# Allegro board MB1315A.brd
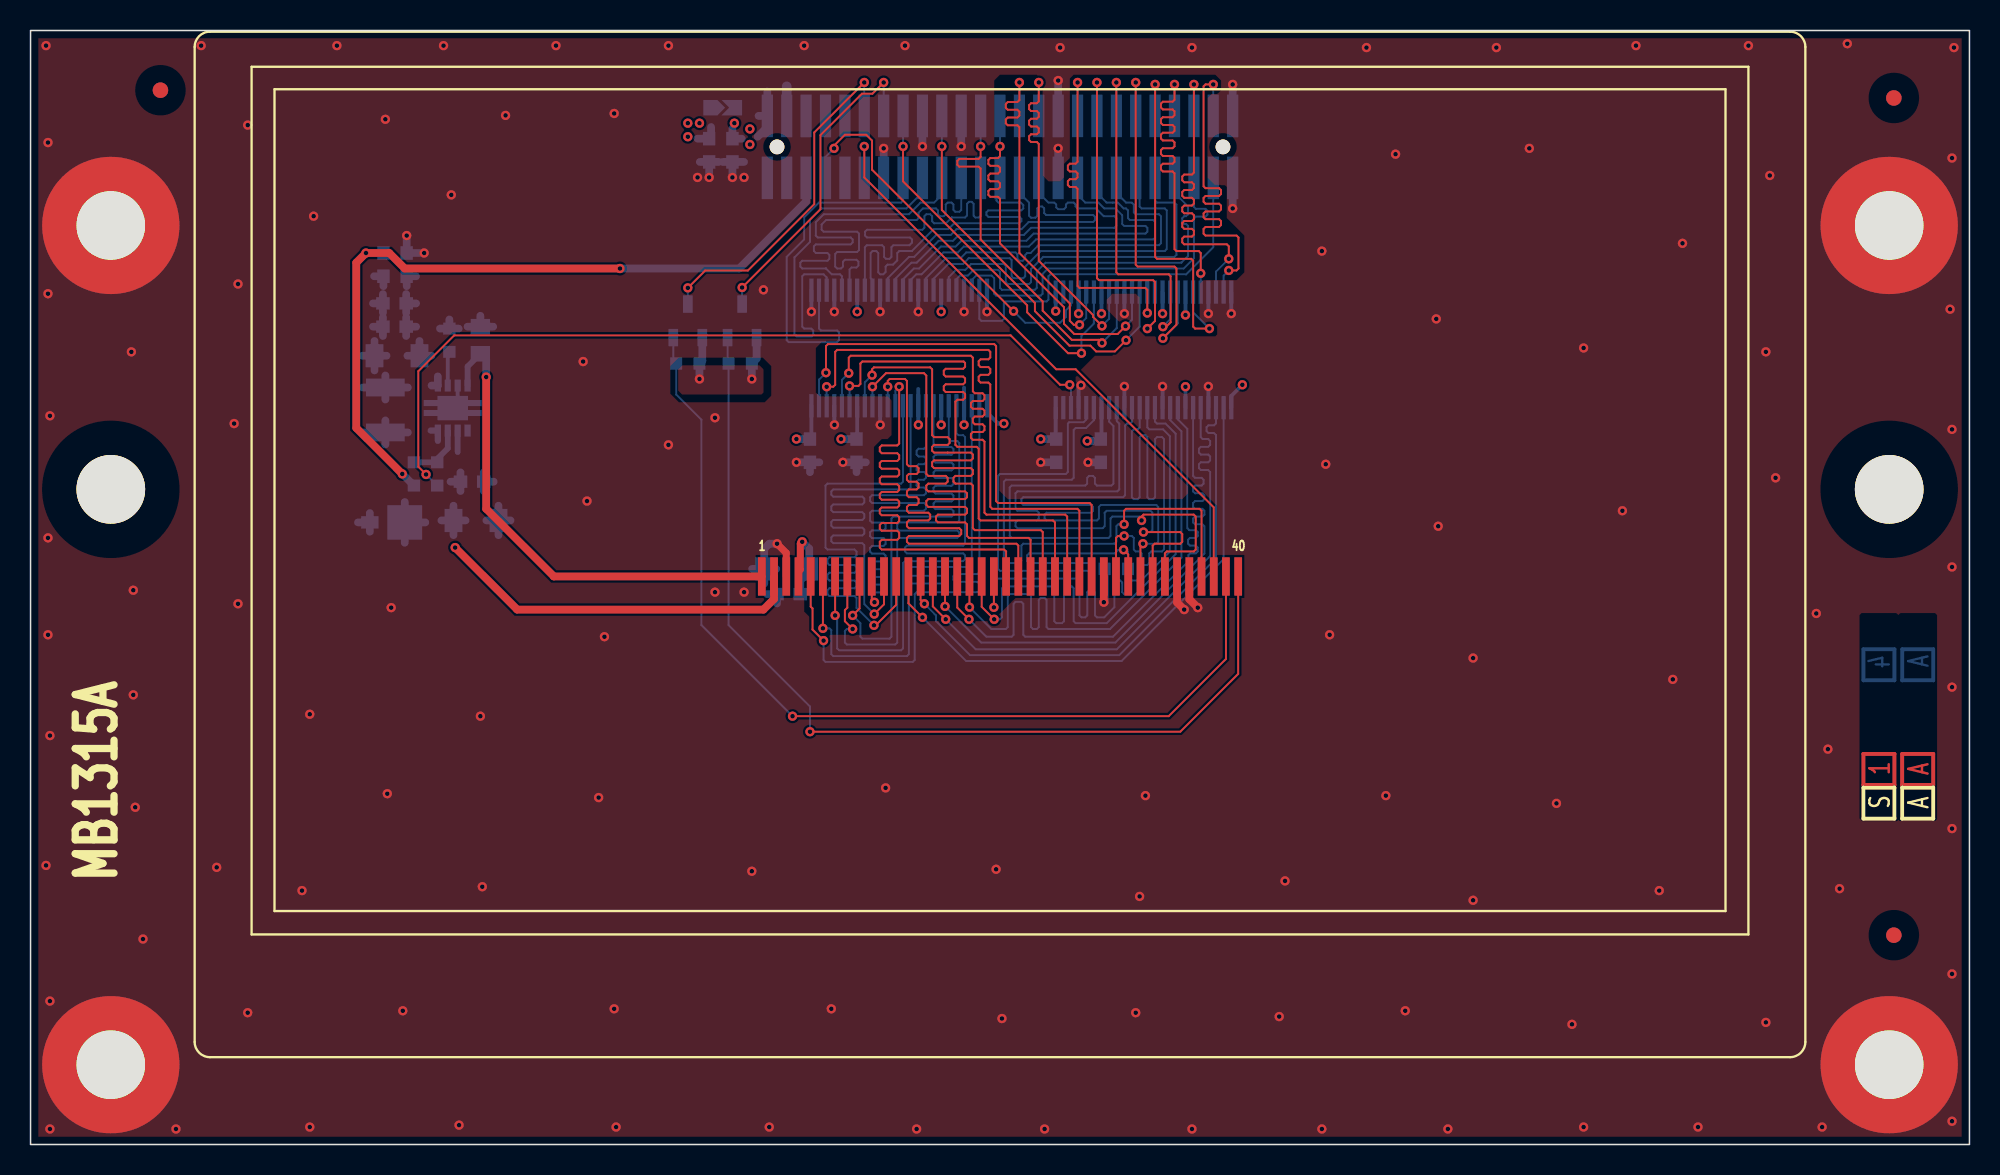
[diagram p0: board, top side]
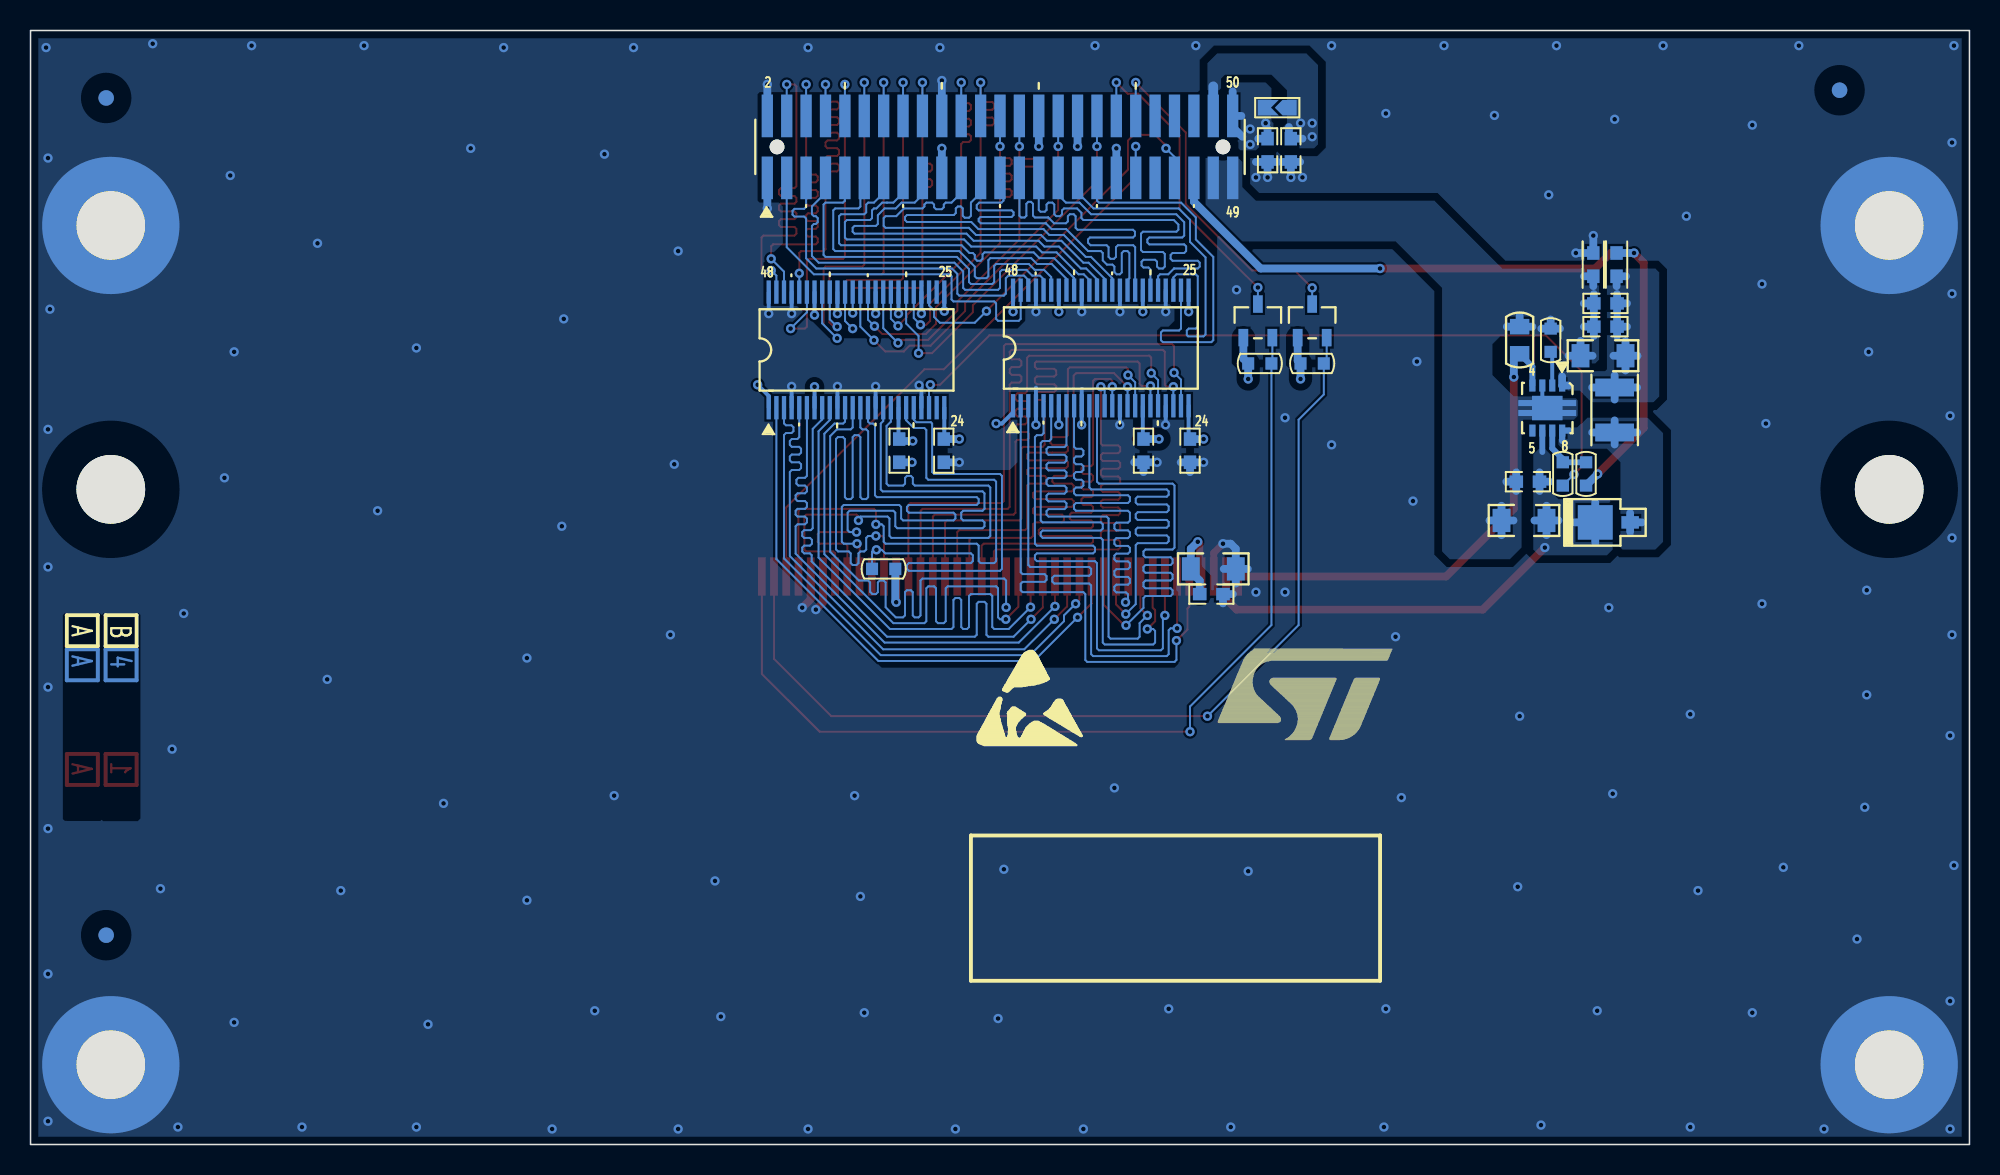
[diagram p1: board, bottom side, seen from below]

Outline 127 x 73 mm; copper layers: TOP, L2_GND, L3_VCC, BOTTOM. Coordinates in mm from the lower left corner of the outline.
Outline path: rectangle 0,0 127,73 ; 0,73 127,73 127,0 0,0 0,73

## Placement (name value [footprint] x y rotation side)
C1  100nF  [0603C]  45.97 65.15 90 bottom
C2  100nF  [0603C]  44.45 65.15 90 bottom
C3  100nF  [0603C]  23.84 55.12 180 bottom
C4  10nF  [0603C]  23.84 53.59 180 bottom
C5  4.7uF_16V  [1206C]  24 51.69 0 bottom
C6  100nF  [0603C]  70.1 45.47 90 bottom
C7  100nF  [0603C]  67.18 45.47 90 bottom
C8  100nF  [0603C]  54.1 45.47 90 bottom
C9  100nF  [0603C]  51.05 45.47 90 bottom
C10  10nF  [0603C]  28.92 43.43 180 bottom
C11  4.7uF_50V  [1206C]  29.18 40.89 0 bottom
C12  4.7uF_16V  [1206C]  49.53 37.72 180 bottom
C13  100nF  [0603C]  49.66 36.07 0 bottom
CN1  P127B-2_25MGF-079-1A  [FTSH-125-01-F-DV]  63.5 65.37 180 bottom
H1  POSITION HOLE  [HOLE_C9D4R5]  5.26 60.23 0 top
H2  POSITION HOLE  [HOLE_C9D4R5]  121.74 60.23 0 top
H3  POSITION HOLE  [HOLE_C9D4R5]  5.26 5.23 0 top
H4  POSITION HOLE  [HOLE_C9D4R5]  121.74 5.23 0 top
L1  BEAD  [0603L]  24.64 57.66 270 bottom
L2  BEAD  [0603L]  23.11 57.66 270 bottom
L3  4.7uH(1A)  [1210L]  23.24 48.13 270 bottom
NOREF  -  [unnamed]  122.05 13.72 0 top
NOREF#2  -  [#2]  0 0 0 top
NOREF#3  -  [unnamed]  122.05 68.58 0 top
NOREF#4  -  [#2]  124.37 24.58 90 top
NOREF#5  -  [#2]  167 108.84 0 top
NOREF#6  -  [unnamed]  8.51 69.09 0 top
NOREF#7  -  [#2]  0 0 90 top
NOREF#8  -  [unnamed#2]  5.26 42.93 0 top
NOREF#9  -  [#2]  389.13 -90.55 0 top
NOREF#10  -  [#2]  121.83 24.58 90 top
NOREF#11  -  [#2]  0 0 0 top
NOREF#12  -  [#2]  184.4 145.8 0 top
NOREF#13  -  [unnamed#2]  121.74 42.93 0 top
NOREF#14  -  [#2]  4.06 -24.89 0 top
NOREF#15  -  [unnamed]  8.51 69.09 180 bottom
NOREF#16  -  [unnamed]  122.05 68.58 180 bottom
NOREF#17  -  [unnamed]  122.05 13.72 180 bottom
R1  10_1%_0805  [0805R]  29.46 52.7 270 bottom
R2  100K  [0603R]  27.43 52.7 270 bottom
R3  4K7  [0603R]  46.48 51.18 0 bottom
R4  4K7  [0603R]  43.05 51.18 0 bottom
R5  0  [0603R]  26.64 43.94 270 bottom
R6  4K7  [0603R]  25.11 43.94 270 bottom
R7  4K7  [0603R]  71.12 37.72 180 bottom
SB1  Solder Bridge OFF  [SB_0603]  45.34 67.94 180 bottom
T1  BSN20  [SOT23-213]  46.61 53.98 270 bottom
T2  BSN20  [SOT23-213]  43.05 53.98 270 bottom
U1  RK043FN48H-CT672B  [LCD_RK043FN48H-CT672B]  63.5 39.32 0 top
U2  SN74LVC16T245DGGR  [TSSOP48_0R5_12R5X8R1]  56.9 52.2 180 bottom
U3  SN74LVC16T245DGGR  [TSSOP48_0R5_12R5X8R1]  72.9 52.07 180 bottom
U4  STLD40DPUR  [SON8_0R65_3X3]  27.65 48.26 0 bottom
Z1  STPS1L40M  [DO-216AA]  22.23 40.77 180 bottom

## Library data of the parts
C1-C4 C6-C10 C13 = 0603C
C5 C11 C12 = 1206C
CN1 = FTSH-125-01-F-DV
H1-H4 = HOLE_C9D4R5
L1 L2 = 0603L
L3 = 1210L
R1 = 0805R
R2-R6 = 0603R
R7 = 0603R: signal model: 0603R_4K7
SB1 = SB_0603
T1 T2 = SOT23-213
U1 = LCD_RK043FN48H-CT672B
U2 U3 = TSSOP48_0R5_12R5X8R1
U4 = SON8_0R65_3X3
Z1 = DO-216AA

## Footprints (pads in the part's own frame, mm; a bottom-side part is the same pattern mirrored in y, then rotated)
0603C
  rect 0.889x0.813 smd: 1(-0.762,0) 2(0.762,0)
0603L
  rect 0.889x0.813 smd: 1(-0.762,0) 2(0.762,0)
0603R
  rect 0.787x0.813 smd: 1(-0.762,0) 2(0.762,0)
0805R
  rect 1.016x1.27 smd: 1(-0.889,0) 2(0.889,0)
1206C
  rect 1.168x1.524 smd: 1(-1.473,0) 2(1.473,0)
1210L
  rect 1.168x2.54 smd: 1(-1.473,0) 2(1.473,0)
DO-216AA
  rect 1.143x0.813 smd: 1(0,0)
  rect 2.286x2.261 smd: 2(-2.286,0)
FTSH-125-01-F-DV
  round 0.965 hole 0.965 unplated: (-14.605,0) (14.605,0)
  rect 0.737x2.794 smd: 1(-15.24,-2.03) 2(-15.24,2.03) 3(-13.97,-2.03) 4(-13.97,2.03) 5(-12.7,-2.03) 6(-12.7,2.03) 7(-11.43,-2.03) 8(-11.43,2.03) 9(-10.16,-2.03) 10(-10.16,2.03) 11(-8.89,-2.03) 12(-8.89,2.03) 13(-7.62,-2.03) 14(-7.62,2.03) 15(-6.35,-2.03) 16(-6.35,2.03) 17(-5.08,-2.03) 18(-5.08,2.03) 19(-3.81,-2.03) 20(-3.81,2.03) 21(-2.54,-2.03) 22(-2.54,2.03) 23(-1.27,-2.03) 24(-1.27,2.03) 25(0,-2.03) 26(0,2.03) 27(1.27,-2.03) 28(1.27,2.03) 29(2.54,-2.03) 30(2.54,2.03) 31(3.81,-2.03) 32(3.81,2.03) 33(5.08,-2.03) 34(5.08,2.03) 35(6.35,-2.03) 36(6.35,2.03) 37(7.62,-2.03) 38(7.62,2.03) 39(8.89,-2.03) 40(8.89,2.03) 41(10.16,-2.03) 42(10.16,2.03) 43(11.43,-2.03) 44(11.43,2.03) 45(12.7,-2.03) 46(12.7,2.03) 47(13.97,-2.03) 48(13.97,2.03) 49(15.24,-2.03) 50(15.24,2.03)
HOLE_C9D4R5
  round 8.992 hole 4.496: 1(0,0)
LCD_RK043FN48H-CT672B
  rect 0.508x2.515 smd: 1(-15.6,-2.1) 2(-14.8,-2.1) 3(-14,-2.1) 4(-13.2,-2.1) 5(-12.4,-2.1) 6(-11.6,-2.1) 7(-10.8,-2.1) 8(-10,-2.1) 9(-9.2,-2.1) 10(-8.4,-2.1) 11(-7.6,-2.1) 12(-6.8,-2.1) 13(-6,-2.1) 14(-5.2,-2.1) 15(-4.4,-2.1) 16(-3.6,-2.1) 17(-2.8,-2.1) 18(-2,-2.1) 19(-1.2,-2.1) 20(-0.4,-2.1) 21(0.4,-2.1) 22(1.2,-2.1) 23(2,-2.1) 24(2.8,-2.1) 25(3.6,-2.1) 26(4.4,-2.1) 27(5.2,-2.1) 28(6,-2.1) 29(6.8,-2.1) 30(7.6,-2.1) 31(8.4,-2.1) 32(9.2,-2.1) 33(10,-2.1) 34(10.8,-2.1) 35(11.6,-2.1) 36(12.4,-2.1) 37(13.2,-2.1) 38(14,-2.1) 39(14.8,-2.1) 40(15.6,-2.1)
SB_0603
  round 0.152 smd: 1(-0.762,0) 2(0.762,0)
SON8_0R65_3X3
  rect 0.406x0.787 smd: 1(-0.975,-1.475) 2(-0.325,-1.475) 3(0.325,-1.475) 4(0.975,-1.475) 5(0.975,1.475) 6(0.325,1.475) 7(-0.325,1.475) 8(-0.975,1.475)
  custom 3.8x1.6 smd: 9(0,0)
SOT23-213
  rect 1.143x0.635 smd: 1(1.1,0.95) 2(1.1,-0.95) 3(-1.1,0)
TSSOP48_0R5_12R5X8R1
  rect 0.279x1.524 smd: 1(-5.75,-3.787) 2(-5.25,-3.787) 3(-4.75,-3.787) 4(-4.25,-3.787) 5(-3.75,-3.787) 6(-3.25,-3.787) 7(-2.75,-3.787) 8(-2.25,-3.787) 9(-1.75,-3.787) 10(-1.25,-3.787) 11(-0.75,-3.787) 12(-0.25,-3.787) 13(0.25,-3.787) 14(0.75,-3.787) 15(1.25,-3.787) 16(1.75,-3.787) 17(2.25,-3.787) 18(2.75,-3.787) 19(3.25,-3.787) 20(3.75,-3.787) 21(4.25,-3.787) 22(4.75,-3.787) 23(5.25,-3.787) 24(5.75,-3.787) 25(5.75,3.787) 26(5.25,3.787) 27(4.75,3.787) 28(4.25,3.787) 29(3.75,3.787) 30(3.25,3.787) 31(2.75,3.787) 32(2.25,3.787) 33(1.75,3.787) 34(1.25,3.787) 35(0.75,3.787) 36(0.25,3.787) 37(-0.25,3.787) 38(-0.75,3.787) 39(-1.25,3.787) 40(-1.75,3.787) 41(-2.25,3.787) 42(-2.75,3.787) 43(-3.25,3.787) 44(-3.75,3.787) 45(-4.25,3.787) 46(-4.75,3.787) 47(-5.25,3.787) 48(-5.75,3.787)
unnamed
  round 1.016 smd: (0,0)
unnamed#2
  round 4.496 hole 4.496 unplated: (0,0)

## Nets
+3V3: C1.2 C6.2 C8.2 C12.1 C13.2 CN1.50 R3.2 R4.2 SB1.1 T1.2 T2.2 U1.4 U2.7 U2.18 U3.7 U3.18
GND: C1.1 C2.1 C6.1 C7.1 C8.1 C9.1 C12.2 C13.1 CN1.1 CN1.2 CN1.19 CN1.20 CN1.30 CN1.34 CN1.37 H1.1 H2.1 H3.1 H4.1 L1.1 R7.2 U1.3 U1.29 U1.35 U1.36 U2.4 U2.10 U2.15 U2.21 U2.25 U2.28 U2.34 U2.39 U2.45 U2.48 U3.4 U3.10 U3.15 U3.21 U3.25 U3.28 U3.34 U3.39 U3.45 U3.48
VDD: C2.2 C7.2 C9.2 CN1.48 SB1.2 U2.1 U2.24 U2.31 U2.42 U3.1 U3.24 U3.31 U3.42
B0: U1.21 U2.13
B1: U1.22 U2.14
B2: U1.23 U2.16
B3: U1.24 U2.17
B4: U1.25 U2.19
B5: U1.26 U2.20
B6: U1.27 U2.22
B7: U1.28 U2.23
BL_CTRL: R5.2 U3.22
BLGND: C3.1 C4.1 C5.2 C10.1 C11.2 CN1.47 CN1.49 L1.2 R1.1 R2.1 U4.3 U4.9
BLVDD: CN1.45 L2.1 R6.2
CLK: U1.30 U3.13
DE: U1.34 U3.17
DISP: R7.1 U1.31 U3.20
G0: U1.13 U3.2
G1: U1.14 U3.3
G2: U1.15 U3.5
G3: U1.16 U3.6
G4: U1.17 U3.8
G5: U1.18 U3.9
G6: U1.19 U3.11
G7: U1.20 U3.12
HSYNC: U1.32 U3.14
I2C_SCL: CN1.40 T2.3
I2C_SCL_3V3: R4.1 T2.1 U1.39
I2C_SDA: CN1.38 T1.3
I2C_SDA_3V3: R3.1 T1.1 U1.40
LCD_B0: CN1.21 U2.36
LCD_B1: CN1.23 U2.35
LCD_B2: CN1.25 U2.33
LCD_B3: CN1.27 U2.32
LCD_B4: CN1.29 U2.30
LCD_B5: CN1.31 U2.29
LCD_B6: CN1.33 U2.27
LCD_B7: CN1.35 U2.26
LCD_BL_A: C10.2 C11.1 U1.2 U4.6 Z1.2
LCD_BL_CTRL: CN1.43 U3.27
LCD_BL_K: R1.2 U1.1 U4.4
LCD_CLK: CN1.32 U3.36
LCD_DE: CN1.22 U3.32
LCD_DISP: CN1.24 U3.29
LCD_G0: CN1.4 U3.47
LCD_G1: CN1.6 U3.46
LCD_G2: CN1.8 U3.44
LCD_G3: CN1.10 U3.43
LCD_G4: CN1.12 U3.41
LCD_G5: CN1.14 U3.40
LCD_G6: CN1.16 U3.38
LCD_G7: CN1.18 U3.37
LCD_HSYNC: CN1.26 U3.35
LCD_INT: CN1.39 U1.38
LCD_R0: CN1.3 U2.47
LCD_R1: CN1.5 U2.46
LCD_R2: CN1.7 U2.44
LCD_R3: CN1.9 U2.43
LCD_R4: CN1.11 U2.41
LCD_R5: CN1.13 U2.40
LCD_R6: CN1.15 U2.38
LCD_R7: CN1.17 U2.37
LCD_RST: CN1.36 U3.30
LCD_VSYNC: CN1.28 U3.33
NETL3_2: L3.2 U4.8 Z1.1
NETR2_2: R2.2 U4.2
NETR5_1: R5.1 R6.1 U4.7
R0: U1.5 U2.2
R1: U1.6 U2.3
R2: U1.7 U2.5
R3: U1.8 U2.6
R4: U1.9 U2.8
R5: U1.10 U2.9
R6: U1.11 U2.11
R7: U1.12 U2.12
RST: U1.37 U3.19
VL: C3.2 C4.2 C5.1 L2.2 L3.1 U4.1
VSYNC: U1.33 U3.16

Pads without a net: CN1 41 42 44 46; U3 23 26; U4 5

## Via types
v1: diameter 0.61, hole 0.305, TOP to BOTTOM, 250 vias

## Routing (per net, layer and track width the routed paths; a pad name or vN(x,y) marks a point on that pad's centre or on a via; arc(x,y) is an arc through that point)
+3V3: length 25.8
  TOP w0.457: U1.4 50.3,37.55 50.42,37.67 50.42,39.37 v1(50.55,39.5)
  BOTTOM w0.254: C6.2 70.15,46.27 U3.18 ; U3.7 v1(75.65,49.66) ; U2.18 54.15,46.27 C8.2 ; U2.7 v1(59.65,47.16)
  BOTTOM w0.508: C6.2 69.98,46.1 v1(69.22,46.1) ; 47.62,66.04 48.26,66.67 CN1.50 ; C13.2 50.42,36.96 51,37.54 C12.1 51,39.04 v1(50.55,39.5) ; T1.2 47.56,51.5 R3.2 v1(47.24,50.16) ; 47.69,67.4 CN1.50 ; CN1.50 48.26,69 ; v1(43.81,50.16) R4.2 44,51.37 T2.2 ; 46.58,65.91 C1.2 45.97,66.56 ; C8.2 v1(53.09,46.23)
  vias: v1(46.1,66.93) v1(47.12,66.55) v1(47.12,65.53)
GND: length 74.1
  TOP w0.457: v1(48.9,39.37) 49.5,38.76 U1.3
  TOP w0.508: U1.35 75.1,35.52 v1(75.56,35.05) ; U1.29 v1(70.3,35.53) ; U1.36 75.9,35.73 v1(76.45,35.18)
  BOTTOM w0.254: U3.34 v1(71.65,54.45) ; U2.48 v1(62.65,54.57) ; U3.45 v1(77.15,54.45) ; U2.45 v1(61.15,54.57) ; v1(61.15,47.16) U2.4 61.15,49.6 ; v1(58.15,47.16) 58.15,47.26 58.15,47.26 U2.10 58.15,49.51 ; U2.21 52.65,47.26 52.65,47.26 v1(52.65,47.16) ; U2.15 55.65,47.26 55.65,47.26 v1(55.65,47.16) ; U3.4 v1(77.15,49.68) ; U3.28 v1(68.65,54.45) ; U3.39 v1(74.15,54.45) ; U2.28 v1(52.65,54.57) ; U3.25 v1(67.15,54.61) ; U3.21 68.65,49.6 v1(68.8,49.75) ; U2.39 v1(58.15,54.57) ; U2.25 v1(51.15,54.57) ; U2.34 v1(55.65,54.57) ; U3.15 v1(71.65,49.68) ; U3.48 v1(78.65,54.45) ; U3.10 v1(74.15,49.68)
  BOTTOM w0.508: C2.1 v1(44.45,63.37) ; C2.1 45.06,64.39 ; C2.1 43.84,64.39 ; C8.1 54.71,44.7 ; C8.1 54.1,44.06 ; C8.1 v1(53.21,44.7) ; 48.9,35.46 48.9,36.07 48.25,36.07 ; C1.1 46.74,64.39 ; C1.1 45.34,64.39 ; C1.1 v1(45.97,63.37) ; R7.2 70.36,35.59 v1(70.3,35.53) ; 51.05,44.06 C9.1 ; C9.1 51.66,44.7 ; C9.1 v1(50.16,44.7) ; CN1.34 v1(58.42,65.41) ; v1(24.64,59.56) L1.1 v1(25.78,58.42) ; 47.27,37.72 C12.2 ; C12.2 48.06,36.75 ; C12.2 48.84,37.72 ; C12.2 48.06,39.04 48.39,39.37 v1(48.9,39.37) ; CN1.19 v1(67.31,65.28) ; CN1.37 v1(55.88,65.28) ; CN1.30 v1(60.96,65.41) ; C6.1 v1(69.27,44.7) ; C7.1 v1(66.17,44.7) ; CN1.2 v1(78.74,69.47) ; CN1.20 v1(67.31,69.72) ; CN1.1 v1(78.74,61.34)
  vias: v1(1.02,72.01) v1(1.02,18.29) v1(1.14,65.66) v1(1.14,55.75) v1(1.14,39.75) v1(1.14,33.4) v1(1.27,47.75) v1(1.27,26.8) v1(1.27,9.4) v1(1.27,1.02) v1(6.6,51.94) v1(6.73,36.32) v1(6.73,29.46) v1(6.86,22.1) v1(7.37,13.46) v1(9.53,1.02) v1(11.18,72.01) v1(12.19,18.16) v1(13.34,47.24) v1(13.59,56.39) v1(13.59,35.43) v1(14.22,66.8) v1(14.22,8.64) v1(17.78,16.64) v1(18.29,28.19) v1(18.29,1.14) v1(18.54,60.83) v1(20.07,72.01) v1(23.24,67.18) v1(23.37,22.99) v1(23.62,35.18) v1(24.38,8.76) v1(27.05,72.01) v1(27.56,62.23) v1(28.07,1.27) v1(29.46,28.07) v1(29.59,16.89) v1(31.11,67.44) v1(34.42,72.01) v1(36.2,51.31) v1(36.45,42.16) v1(37.21,22.73) v1(37.59,33.27) v1(38.23,67.56) v1(38.23,8.89) v1(38.35,1.14) v1(41.78,72.01) v1(41.78,45.85) v1(43.69,63.37) v1(44.83,47.62) v1(44.83,36.2) v1(46.74,63.37) v1(46.74,36.2) v1(47.24,17.91) v1(48.01,56.01) v1(48.39,1.14) v1(50.67,72.01) v1(52.45,8.89) v1(56.01,23.37) v1(57.28,72.01) v1(58.04,1.02) v1(63.25,18.03) v1(63.63,8.26) v1(66.42,1.02) v1(67.44,71.88) v1(72.39,8.64) v1(72.64,16.26) v1(73.03,22.86) v1(76.07,71.88) v1(76.07,1.02) v1(81.79,8.38) v1(82.17,17.27) v1(84.58,58.55) v1(84.58,1.02) v1(84.84,44.58) v1(85.09,33.4) v1(87.5,71.88) v1(88.77,22.86) v1(89.41,64.9) v1(90.04,8.76) v1(92.08,54.1) v1(92.2,40.51) v1(92.84,1.02) v1(94.49,31.88) v1(94.49,16) v1(96.01,71.88) v1(98.17,65.28) v1(99.95,22.35) v1(100.97,7.87) v1(101.73,52.2) v1(101.73,1.14) v1(104.27,41.53) v1(105.16,72.01) v1(106.68,16.64) v1(107.57,30.48) v1(108.2,59.05) v1(109.22,1.14) v1(112.52,72.01) v1(113.67,51.94) v1(113.67,8) v1(113.92,63.5) v1(114.3,43.69) v1(116.97,34.8) v1(117.35,1.14) v1(117.73,25.91) v1(118.49,16.76) v1(119,72.14) v1(125.73,54.74) v1(125.86,64.64) v1(125.86,46.86) v1(125.86,37.85) v1(125.86,29.97) v1(125.86,20.7) v1(125.86,11.18) v1(125.86,1.52) v1(125.98,71.88)
VDD: length 19.2
  BOTTOM w0.254: C7.2 67.15,46.26 U3.24 ; C9.2 51.15,46.32 U2.24 ; v1(79.38,49.78) 78.65,49.06 U3.1 ; U3.42 v1(75.65,54.36) ; U2.42 v1(59.65,54.57) ; U2.1 62.65,47.97 63.37,47.24 v1(63.75,47.24) ; U3.31 v1(70.15,54.45) ; U2.31 v1(54.15,54.57)
  BOTTOM w0.508: C9.2 v1(50.16,46.23) ; 44.58,66.67 44.58,65.91 C2.2 43.69,65.91 ; C7.2 v1(66.17,46.23)
  BOTTOM w0.635: CN1.48 49.53,69.34
  vias: v1(43.05,66.93) v1(43.05,66.04) v1(43.81,66.93)
B0: length 36.5
  TOP w0.127: U1.21 63.9,38.86 63.77,38.99 55.75,38.99 55.63,39.12 55.63,39.5 55.75,39.62 56.77,39.62 56.9,39.75 56.9,40.09 56.77,40.22 55.75,40.22 55.63,40.35 55.63,40.6 55.75,40.73 56.77,40.73 56.9,40.86 56.9,41.11 56.77,41.24 55.75,41.24 55.63,41.36 55.63,41.62 55.75,41.74 56.77,41.74 56.9,41.87 56.9,42.13 56.77,42.25 55.75,42.25 55.63,42.38 55.63,42.63 55.75,42.76 56.77,42.76 56.9,42.89 56.9,43.14 56.77,43.27 55.75,43.27 55.63,43.4 55.63,43.65 55.75,43.78 56.77,43.78 56.9,43.9 56.9,44.16 56.77,44.28 55.75,44.28 55.63,44.41 55.63,44.67 55.75,44.79 56.77,44.79 56.9,44.92 56.9,45.17 56.77,45.3 55.75,45.3 55.63,45.43 55.63,45.68 55.75,45.81 56.77,45.81 56.9,45.94 v1(56.9,49.66)
  BOTTOM w0.127: v1(56.9,49.66) 56.65,49.41 U2.13
B1: length 36.2
  TOP w0.127: U1.22 64.7,39.24 64.57,39.37 57.53,39.37 57.4,39.5 57.4,39.75 57.53,39.88 60.83,39.88 60.96,40.01 60.96,40.26 60.83,40.39 57.53,40.39 57.4,40.51 57.4,40.77 57.53,40.89 58.8,40.89 58.93,41.02 58.93,41.27 58.8,41.4 57.53,41.4 57.4,41.53 57.4,41.78 57.53,41.91 58.04,41.91 58.17,42.04 58.17,42.29 58.04,42.42 57.53,42.42 57.4,42.55 57.4,42.8 57.53,42.93 58.04,42.93 58.17,43.05 58.17,43.31 58.04,43.43 57.53,43.43 57.4,43.56 57.4,43.81 57.53,43.94 58.04,43.94 58.17,44.07 58.17,44.32 58.04,44.45 57.53,44.45 57.4,44.58 57.4,50.04 57.28,50.16 56.27,50.16 56.15,50.04 v1(56.15,49.66)
  BOTTOM w0.127: U2.14 v1(56.15,49.66)
B2: length 36.2
  TOP w0.127: v1(55.15,49.66) 56.03,50.55 58.52,50.55 58.67,50.39 58.67,43.94 58.8,43.81 59.94,43.81 60.07,43.69 60.07,43.43 59.94,43.31 58.8,43.31 58.67,43.18 58.67,42.93 58.8,42.8 61.21,42.8 61.34,42.67 61.34,42.42 61.21,42.29 58.8,42.29 58.67,42.16 58.67,41.91 58.8,41.78 61.21,41.78 61.34,41.66 61.34,41.4 61.21,41.27 59.44,41.27 59.31,41.15 59.31,40.89 59.44,40.77 61.21,40.77 61.34,40.64 61.34,39.88 61.47,39.75 65.37,39.75 65.5,39.62 U1.23
  BOTTOM w0.127: U2.16 v1(55.15,49.66)
B3: length 36.4
  TOP w0.127: v1(55.12,50.42) 55.12,50.8 55.24,50.93 58.93,50.93 59.05,50.8 59.05,46.48 59.18,46.35 60.07,46.35 60.2,46.23 60.2,45.97 60.07,45.84 59.18,45.84 59.05,45.72 59.05,45.46 59.18,45.34 60.07,45.34 60.07,45.34 61.59,45.34 61.72,45.21 61.72,44.96 61.59,44.83 59.18,44.83 59.05,44.7 59.05,44.45 59.18,44.32 61.59,44.32 61.72,44.2 61.72,43.94 61.59,43.81 60.58,43.81 60.45,43.69 60.45,43.43 60.58,43.31 61.59,43.31 61.72,43.18 61.72,40.39 61.85,40.26 66.17,40.26 66.3,40.13 U1.24
  BOTTOM w0.127: U2.17 54.65,49.95 v1(55.12,50.42)
B4: length 36.1
  TOP w0.127: v1(53.65,49.71) 54.23,49.71 54.36,49.84 54.36,51.18 54.48,51.31 61.12,51.31 61.21,51.21 61.21,50.96 61.09,50.83 59.94,50.83 59.82,50.71 59.82,50.45 59.94,50.33 61.09,50.33 61.21,50.2 61.21,49.94 61.09,49.82 59.94,49.82 59.82,49.69 59.82,49.44 59.94,49.31 61.09,49.31 61.21,49.18 61.21,48.93 61.09,48.8 60.71,48.8 60.58,48.67 60.58,45.85 60.71,45.72 61.98,45.72 62.1,45.59 62.1,41.02 62.23,40.89 66.97,40.89 67.1,40.77 U1.25
  BOTTOM w0.127: U2.19 v1(53.65,49.71)
B5: length 36
  TOP w0.127: v1(53.59,50.55) 53.59,51.56 53.72,51.69 61.59,51.69 61.72,51.56 61.72,49.36 61.85,49.23 62.36,49.23 62.48,49.1 62.48,48.85 62.36,48.72 61.72,48.72 61.59,48.59 61.59,48.34 61.72,48.21 62.36,48.21 62.48,48.09 62.48,47.83 62.36,47.7 61.85,47.7 61.72,47.58 61.72,47.32 61.85,47.2 62.36,47.2 62.48,47.07 62.48,46.82 62.36,46.69 61.72,46.69 61.59,46.56 61.59,46.31 61.72,46.18 62.36,46.18 62.48,46.05 62.48,41.4 62.61,41.27 67.77,41.27 67.9,41.15 U1.26
  BOTTOM w0.127: U2.20 53.15,50.1 v1(53.59,50.55)
B6: length 37.1
  TOP w0.127: U1.27 68.7,41.53 68.57,41.66 62.99,41.66 62.87,41.78 62.87,49.8 62.74,49.93 62.23,49.93 62.1,50.06 62.1,50.31 62.23,50.44 62.74,50.44 62.87,50.56 62.87,50.82 62.74,50.95 62.23,50.95 62.1,51.07 62.1,51.33 62.23,51.45 62.74,51.45 62.87,51.58 62.87,51.94 62.74,52.07 52.83,52.07 52.7,51.94 52.7,49.78 52.58,49.66 v1(52.15,49.66)
  BOTTOM w0.127: U2.22 v1(52.15,49.66)
B7: length 36.6
  TOP w0.127: v1(52.1,50.58) 52.1,52.32 52.23,52.45 63.12,52.45 63.25,52.32 63.25,42.16 63.37,42.04 69.37,42.04 69.5,41.91 U1.28
  BOTTOM w0.127: U2.23 51.65,50.12 v1(52.1,50.58)
BL_CTRL: length 54.5
  TOP w0.127: v1(68.07,49.79) 67.44,49.79 64.2,53.02 27.75,53.02 25.4,50.67 25.4,44.42 v1(25.91,43.91)
  BOTTOM w0.127: R5.2 v1(25.91,43.91) ; U3.22 68.15,49.7 v1(68.07,49.79)
BLGND: length 18.7
  BOTTOM w0.254: U4.3 27.98,48.59 U4.9
  BOTTOM w0.508: 24.64,56.25 L1.2 25.25,56.9 ; C11.2 31.44,40.89 ; C11.2 30.65,41.86 ; C11.2 29.86,40.89 ; C11.2 30.65,39.93 ; C10.1 29.68,44.04 ; C10.1 30.33,43.43 ; C10.1 29.68,42.82 ; 24.69,51.69 C5.2 ; C5.2 25.48,52.65 ; C5.2 26.26,51.69 ; C3.1 24.6,55.73 ; C3.1 25.25,55.12 ; C3.1 24.6,54.51 ; 26.82,53.47 R2.1 ; R2.1 28.04,53.47 ; R2.1 27.43,54.06 ; C4.1 25.25,53.59 ; C4.1 24.6,54.2 ; C4.1 24.6,52.98 ; 28.63,53.59 R1.1 ; R1.1 29.46,54.31 ; R1.1 30.3,53.59
BLVDD: length 50.8
  TOP w0.508: v1(24.35,43.94) 21.34,46.96 21.34,57.78 v1(21.97,58.42) 23.5,58.42 24.51,57.4 v1(38.61,57.4)
  BOTTOM w0.508: v1(38.61,57.4) 46.42,57.4 50.8,61.78 CN1.45 ; R6.2 v1(24.35,43.94) ; L2.1 v1(21.97,58.42)
CLK: length 35.8
  TOP w0.127: v1(71.63,39.88) 71.23,39.88 71.1,39.75 U1.30
  BOTTOM w0.127: U3.13 72.65,46.99 72.52,46.86 72.26,46.86 72.14,46.74 72.14,42.42 72.26,42.29 72.52,42.29 72.64,42.42 72.64,46.35 72.77,46.48 73.03,46.48 73.15,46.35 73.15,42.42 73.28,42.29 73.53,42.29 73.66,42.42 73.66,46.23 73.79,46.35 74.12,46.35 74.24,46.23 74.24,39 74.11,38.86 73.41,38.86 73.28,38.73 73.28,38.1 73.15,37.97 72.9,37.97 72.77,38.1 72.77,38.73 72.64,38.86 72.39,38.86 72.26,38.99 72.26,39.75 72.14,39.88 v1(71.63,39.88)
DE: length 36
  TOP w0.127: v1(72.77,40.89) 72.77,41.15 72.9,41.27 76.19,41.27 76.32,41.15 76.32,38.98 76.2,38.86 74.43,38.86 74.3,38.73 U1.34
  BOTTOM w0.127: U3.17 70.65,47.37 70.93,47.09 70.93,43.31 70.8,43.18 69.84,43.18 69.72,43.31 69.72,43.69 69.59,43.81 69.34,43.81 69.21,43.69 69.21,43.31 69.08,43.18 64.26,43.18 64.14,43.05 64.14,39.88 64.26,39.75 70.61,39.75 70.74,39.88 70.74,41.02 70.87,41.15 72.64,41.15 72.77,41.02 v1(72.77,40.89)
DISP: length 37.2
  TOP w0.127: U1.31 71.9,38.67 v1(71.6,38.97)
  BOTTOM w0.127: R7.1 71.88,38.84 71.75,38.97 v1(71.6,38.97) 71.25,38.97 71.01,38.73 65.41,38.73 65.28,38.61 65.28,38.23 65.41,38.1 69.47,38.1 69.6,37.97 69.6,37.72 69.47,37.59 63.5,37.59 63.37,37.72 63.37,43.81 63.5,43.94 67.82,43.94 67.94,44.07 67.94,47.24 68.03,47.33 68.98,47.33 69.15,47.5 U3.20
G0: length 36.7
  TOP w0.127: U1.13 57.5,35.46 v1(58.42,34.54)
  BOTTOM w0.127: v1(58.42,34.54) 61.28,31.69 71.47,31.69 78.15,38.37 U3.2
G1: length 36.1
  TOP w0.127: U1.14 58.3,35.68 v1(58.55,35.43)
  BOTTOM w0.127: U3.3 77.65,47.26 77.52,47.13 77.16,47.13 77.03,47 77.03,46.75 77.16,46.62 77.52,46.62 77.65,46.49 77.65,38.41 71.31,32.07 61.53,32.07 59.31,34.29 59.31,34.67 v1(58.55,35.43)
G2: length 36.4
  TOP w0.127: v1(59.94,34.42) 59.1,35.26 U1.15
  BOTTOM w0.127: U3.5 76.65,46.35 76.78,46.23 77.14,46.23 77.27,46.1 77.27,45.85 77.14,45.72 76.66,45.72 76.53,45.59 76.53,45.34 76.66,45.21 77.14,45.21 77.27,45.09 77.27,44.83 77.14,44.7 76.66,44.7 76.53,44.58 76.53,44.32 76.66,44.2 77.14,44.2 77.27,44.07 77.27,38.56 71.15,32.45 61.91,32.45 v1(59.94,34.42)
G3: length 35.9
  TOP w0.127: U1.16 v1(59.9,35.26)
  BOTTOM w0.127: v1(59.9,35.26) 62.27,32.89 71.06,32.89 76.89,38.72 76.89,40.51 76.76,40.64 76.27,40.64 76.15,40.77 76.15,41.02 76.27,41.15 76.76,41.15 76.89,41.27 76.89,41.53 76.76,41.66 76.27,41.66 76.15,41.78 76.15,42.04 76.27,42.16 76.76,42.16 76.89,42.29 76.89,42.55 76.76,42.67 76.27,42.67 76.15,42.8 76.15,43.05 76.27,43.18 76.71,43.18 76.83,43.31 76.83,43.56 76.71,43.69 76.27,43.69 76.15,43.81 U3.6
G4: length 36.6
  TOP w0.127: U1.17 60.7,35.19 v1(61.47,34.42)
  BOTTOM w0.127: v1(61.47,34.42) 62.61,33.27 64.26,33.27 64.39,33.4 64.39,35.43 64.52,35.56 64.9,35.56 65.02,35.43 65.02,33.4 65.15,33.27 70.9,33.27 75.84,38.21 75.84,38.63 75.95,38.73 76.33,38.73 76.45,38.86 76.45,39.12 76.33,39.24 75.95,39.24 75.82,39.37 75.82,39.62 75.95,39.75 76.33,39.75 76.45,39.88 76.45,40.13 76.33,40.26 75.89,40.26 75.77,40.39 75.77,46.89 75.15,47.51 U3.8
G5: length 36.6
  TOP w0.127: U1.18 v1(61.5,35.21)
  BOTTOM w0.127: v1(61.5,35.21) 62.93,33.78 63.88,33.78 64.01,33.91 64.01,35.94 64.14,36.07 65.41,36.07 65.53,35.94 65.53,33.91 65.66,33.78 65.91,33.78 66.04,33.91 66.04,35.69 66.17,35.81 66.42,35.81 66.55,35.69 66.55,33.91 66.67,33.78 70.71,33.78 75.39,38.46 75.39,46.74 74.65,47.47 U3.9
G6: length 36.2
  TOP w0.127: U1.19 62.3,35.24 v1(63.12,34.42)
  BOTTOM w0.127: U3.11 73.65,47.37 73.78,47.24 74.34,47.24 75,46.58 75,38.68 70.48,34.16 68.45,34.16 68.33,34.29 68.33,36.45 68.2,36.58 67.82,36.58 67.69,36.45 67.69,34.29 67.56,34.16 67.18,34.16 67.06,34.29 67.06,36.45 66.93,36.58 63.75,36.58 63.63,36.45 63.63,34.54 63.5,34.42 v1(63.12,34.42)
G7: length 35.8
  TOP w0.127: U1.20 v1(63.1,35.2)
  BOTTOM w0.127: v1(63.1,35.2) 63.1,36.96 63.23,37.08 68.58,37.08 68.71,36.96 68.71,34.67 68.83,34.54 69.09,34.54 69.22,34.67 69.22,36.2 69.34,36.32 69.6,36.32 69.72,36.2 69.72,34.67 69.85,34.54 70.33,34.54 70.99,35.21 70.99,36.83 71.12,36.96 71.37,36.96 71.5,36.83 71.5,36.2 71.63,36.07 71.85,36.07 72.01,36.23 72.01,36.83 72.14,36.96 72.74,36.96 74.62,38.84 74.62,46.42 74.18,46.86 73.27,46.86 73.15,46.99 U3.12
HSYNC: length 35.8
  TOP w0.127: U1.32 72.7,39.2 v1(72.87,39.37)
  BOTTOM w0.127: U3.14 72.15,47.37 72.02,47.24 71.82,47.24 71.69,47.12 71.69,42.55 71.56,42.42 65.02,42.42 64.9,42.29 64.9,42.04 65.02,41.91 69.47,41.91 69.6,41.78 69.6,41.53 69.47,41.4 66.55,41.4 66.42,41.27 66.42,41.02 66.55,40.89 69.85,40.89 69.98,41.02 69.98,41.78 70.1,41.91 73.73,41.91 73.86,41.78 73.86,39.5 73.73,39.37 v1(72.87,39.37)
I2C_SCL: length 23.1
  TOP w0.127: v1(43.05,56.13) 44.19,57.27 46.99,57.27 51.33,61.62 51.33,66.32 v1(54.61,69.6)
  BOTTOM w0.127: CN1.40 v1(54.61,69.6) ; T2.3 v1(43.05,56.13)
I2C_SCL_3V3: length 63.4
  TOP w0.127: U1.39 78.3,31.82 74.55,28.07 v1(49.91,28.07)
  BOTTOM w0.127: T2.1 42.1,51.37 R4.1 42.29,49.15 43.94,47.5 43.94,34.04 v1(49.91,28.07)
I2C_SDA: length 21
  TOP w0.127: v1(46.61,56.16) 51.74,61.29 51.74,66.14 54.46,68.86 55.14,68.86 v1(55.88,69.6)
  BOTTOM w0.127: CN1.38 v1(55.88,69.6) ; T1.3 v1(46.61,56.16)
I2C_SDA_3V3: length 64.1
  TOP w0.127: U1.40 79.1,30.84 75.31,27.05 v1(51.05,27.05)
  BOTTOM w0.127: v1(51.05,27.05) 51.05,28.7 45.72,34.04 R3.1 45.66,51.24 T1.1
LCD_B0: length 24.6
  BOTTOM w0.127: U2.36 56.65,56.73 57.7,57.78 58.04,57.78 59.48,59.22 60.43,59.22 60.81,59.6 60.82,59.6 65.07,59.6 65.54,60.07 70.99,60.07 71.12,60.2 71.12,60.71 70.99,60.83 70.3,60.83 69.79,61.34 68.58,61.34 68.45,61.47 68.45,61.59 68.33,61.72 67.94,61.72 67.82,61.59 67.82,61.42 67.69,61.29 67.31,61.29 67.18,61.42 67.18,61.59 67.06,61.72 66.67,61.72 66.04,62.36 CN1.21
LCD_B1: length 24.3
  BOTTOM w0.127: U2.35 56.15,56.77 57.54,58.17 57.88,58.17 59.32,59.6 60.27,59.6 60.65,59.99 60.66,59.99 64.91,59.99 65.38,60.45 69.6,60.45 69.72,60.58 69.72,60.78 69.6,60.91 66.52,60.91 66.4,61.04 66.4,61.34 66.39,61.34 66.26,61.47 66.07,61.47 65.94,61.34 65.94,60.86 65.81,60.73 65.53,60.73 65.41,60.86 65.41,61.72 64.77,62.36 CN1.23
LCD_B2: length 24.6
  BOTTOM w0.127: U2.33 55.15,56.65 55.03,56.77 55.03,58.42 55.15,58.55 55.4,58.55 55.52,58.42 55.52,57.15 55.65,57.02 55.86,57.02 56.01,57.17 56.01,57.53 56.13,57.66 56.49,57.66 56.77,57.93 56.77,58.42 56.9,58.55 57.69,58.55 57.73,58.55 59.16,59.98 60.11,59.98 60.5,60.37 60.51,60.37 64.76,60.37 64.9,60.51 64.9,60.66 64.78,60.78 62.74,60.78 62.61,60.91 62.61,61.09 62.74,61.21 64.9,61.21 65.02,61.34 65.02,61.56 64.87,61.72 63.4,61.72 63.27,61.85 63.27,62.18 63.5,62.41 CN1.25
LCD_B3: length 24.5
  BOTTOM w0.127: U2.32 54.65,58.8 54.77,58.93 55.78,58.93 55.91,58.8 55.91,58.17 56.03,58.04 56.26,58.04 56.39,58.17 56.39,58.8 56.52,58.93 57.57,58.93 57.73,59.09 57.73,59.31 57.61,59.44 54.79,59.44 54.66,59.56 54.66,59.82 54.79,59.94 58.42,59.94 58.55,60.07 58.55,60.83 58.67,60.96 58.93,60.96 59.05,60.83 59.05,60.49 59.18,60.37 59.96,60.37 60.34,60.75 60.35,60.75 61.21,60.75 61.34,60.87 61.34,61.65 61.47,61.77 61.65,61.77 61.77,61.65 61.77,60.86 61.88,60.75 62.12,60.75 62.23,60.86 CN1.27
LCD_B4: length 24.3
  BOTTOM w0.127: U2.30 53.65,57.34 53.77,57.47 54.1,57.47 54.23,57.6 54.23,57.85 54.1,57.98 53.34,57.98 53.21,57.85 53.21,57.53 53.09,57.4 52.83,57.4 52.7,57.53 52.7,58.36 52.83,58.48 54.14,58.48 54.27,58.61 54.27,59.69 54.14,59.82 51.94,59.82 51.82,59.94 51.82,60.28 52.11,60.58 58.04,60.58 58.17,60.71 58.17,61.06 58.45,61.34 59.31,61.34 59.44,61.21 59.44,60.96 59.56,60.83 59.82,60.83 59.94,60.96 59.94,61.59 60.07,61.72 60.33,61.72 60.45,61.59 60.45,61.24 60.56,61.13 60.85,61.13 60.96,61.24 CN1.29
LCD_B5: length 24.2
  BOTTOM w0.127: U2.29 53.15,56.9 53.02,57.02 52.48,57.02 52.1,57.4 50.55,57.4 50.42,57.53 50.42,57.78 50.55,57.91 52.2,57.91 52.32,58.04 52.32,58.29 52.2,58.42 51.44,58.42 51.31,58.55 51.31,58.86 51.44,58.98 53.72,58.98 53.85,59.11 53.85,59.31 53.72,59.44 51.56,59.44 51.44,59.56 51.44,60.44 51.95,60.96 57.53,60.96 58.29,61.72 59.18,61.72 59.69,62.23 CN1.31
LCD_B6: length 25.3
  BOTTOM w0.127: U2.27 52.15,56.82 51.94,57.02 50.67,57.02 50.55,56.9 50.55,53.59 50.67,53.47 51.14,53.47 51.27,53.34 51.27,53.04 51.18,52.96 50.16,52.96 50.04,53.09 50.04,58.14 51.05,59.15 51.05,60.6 51.8,61.34 57.37,61.34 58.14,62.1 58.14,62.1 58.42,62.38 CN1.33
LCD_B7: length 24.9
  BOTTOM w0.127: CN1.35 57.15,61.85 57.02,61.72 51.64,61.72 50.67,60.76 50.67,59.31 49.53,58.17 49.53,52.7 49.66,52.58 52.83,52.58 52.96,52.7 52.96,53.21 52.83,53.34 51.77,53.34 51.65,53.47 U2.26
LCD_BL_A: length 35.1
  TOP w0.508: v1(27.81,39.12) 31.88,35.05 48.01,35.05 48.7,35.75 U1.2
  BOTTOM w0.381: U4.6 27.98,45.38
  BOTTOM w0.508: C11.1 28.49,40.89 ; C11.1 27.7,39.93 ; C11.1 26.92,40.89 ; C11.1 27.7,41.86 ; C10.2 28.16,44.04 ; C10.2 27.51,43.43 ; C10.2 28.16,42.82 ; Z1.2 25.86,40.77 ; Z1.2 24.51,42.1 ; Z1.2 24.51,39.43
LCD_BL_CTRL: length 26
  TOP w0.127: v1(52.63,65.28) 52.63,65.46 53.34,66.17 54.74,66.17 55.12,65.79 55.12,63.88 v1(64.39,54.61)
  BOTTOM w0.127: v1(52.63,65.28) 52.07,64.72 CN1.43 ; U3.27 68.15,54.99 67.82,54.66 67.82,54.23 67.44,53.85 65.15,53.85 v1(64.39,54.61)
LCD_BL_K: length 32.6
  TOP w0.508: v1(29.84,50.29) 29.84,41.66 34.28,37.22 U1.1
  BOTTOM w0.381: R1.2 28.63,50.98 U4.4
  BOTTOM w0.508: R1.2 29.84,51.44 v1(29.84,50.29)
LCD_CLK: length 26.2
  TOP w0.127: v1(59.69,65.41) 59.69,61.24 65.79,55.14 65.79,54.61 68.05,52.35 69.42,52.35 69.8,51.97 71.02,51.97 v1(71.75,52.7)
  BOTTOM w0.127: v1(71.75,52.7) 72.65,53.6 U3.36 ; CN1.32 v1(59.69,65.41)
LCD_DE: length 25.2
  TOP w0.127: v1(66.04,69.6) 66.04,68.36 65.91,68.23 65.53,68.23 65.41,68.11 65.41,67.85 65.53,67.73 65.91,67.73 66.04,67.6 66.04,67.34 65.91,67.22 65.53,67.22 65.41,67.09 65.41,66.84 65.53,66.71 65.91,66.71 66.04,66.58 66.04,66.33 65.91,66.2 65.53,66.2 65.41,66.07 65.41,65.82 65.53,65.69 65.91,65.69 66.04,65.57 66.04,57.91 69.6,54.36 69.6,54.23 v1(70.18,53.64)
  BOTTOM w0.127: v1(70.18,53.64) 70.65,54.11 U3.32 ; CN1.22 v1(66.04,69.6)
LCD_DISP: length 25.2
  TOP w0.127: v1(64.77,69.6) 64.77,68.44 64.64,68.31 64.01,68.31 63.88,68.19 63.88,67.93 64.01,67.81 64.64,67.81 64.77,67.68 64.77,67.42 64.64,67.3 64.01,67.3 63.88,67.17 63.88,66.92 64.01,66.79 64.64,66.79 64.77,66.66 64.77,58.42 68.07,55.12 68.07,53.98 68.33,53.71 v1(68.71,53.71)
  BOTTOM w0.127: CN1.24 v1(64.77,69.6) ; v1(68.71,53.71) 68.71,53.72 69.15,54.16 U3.29
LCD_G0: length 25
  TOP w0.127: v1(78.49,57.28) 78.99,57.28 79.12,57.4 79.12,59.44 78.99,59.56 76.96,59.56 76.83,59.69 76.83,60 76.96,60.13 77.85,60.13 77.98,60.25 77.98,60.51 77.85,60.64 76.96,60.64 76.83,60.76 76.83,61.02 76.96,61.14 77.85,61.14 77.98,61.27 77.98,61.52 77.85,61.65 76.96,61.65 76.83,61.78 76.83,62.03 76.96,62.16 77.85,62.16 77.98,62.29 77.98,62.54 77.85,62.67 76.96,62.67 76.83,62.79 76.83,69.34 76.96,69.47 v1(77.47,69.47)
  BOTTOM w0.127: U3.47 78.15,56.94 v1(78.49,57.28) ; v1(77.47,69.47) CN1.4
LCD_G1: length 24.4
  TOP w0.127: v1(78.49,58.04) 78.49,58.86 78.36,58.99 75.56,58.99 75.44,59.12 75.44,59.37 75.56,59.5 76.07,59.5 76.2,59.62 76.2,59.88 76.07,60.01 75.56,60.01 75.44,60.13 75.44,60.39 75.56,60.51 76.07,60.51 76.2,60.64 76.2,60.89 76.07,61.02 75.56,61.02 75.44,61.15 75.44,61.4 75.56,61.53 76.07,61.53 76.2,61.66 76.2,61.91 76.07,62.04 75.56,62.04 75.44,62.16 75.44,62.42 75.56,62.55 76.07,62.55 76.2,62.67 76.2,62.93 76.07,63.05 75.56,63.05 75.44,63.18 75.44,63.43 75.56,63.56 76.07,63.56 76.2,63.69 v1(76.2,69.47)
  BOTTOM w0.127: U3.46 77.65,57.2 v1(78.49,58.04) ; CN1.6 v1(76.2,69.47)
LCD_G2: length 24.6
  TOP w0.127: v1(74.93,69.47) 74.93,68.46 74.8,68.34 74.17,68.34 74.04,68.21 74.04,67.95 74.17,67.83 74.8,67.83 74.93,67.7 74.93,67.45 74.8,67.32 74.17,67.32 74.04,67.19 74.04,66.94 74.17,66.81 74.8,66.81 74.93,66.68 74.93,66.43 74.8,66.3 74.17,66.3 74.04,66.18 74.04,65.92 74.17,65.8 74.8,65.8 74.93,65.67 74.93,65.41 74.8,65.29 74.17,65.29 74.04,65.16 74.04,64.91 74.17,64.78 74.8,64.78 74.93,64.65 74.93,64.4 74.8,64.27 74.17,64.27 74.04,64.14 74.04,63.89 74.17,63.76 74.8,63.76 74.93,63.64 74.93,58.67 75.06,58.55 76.52,58.55 76.65,58.42 v1(76.65,57.09)
  BOTTOM w0.127: v1(74.93,69.47) CN1.8 ; U3.44 v1(76.65,57.09)
LCD_G3: length 24.2
  TOP w0.127: v1(73.66,69.47) 73.66,58.17 73.79,58.04 76.03,58.04 76.15,57.91 76.15,53.59 76.28,53.47 v1(77.22,53.47)
  BOTTOM w0.127: CN1.10 v1(73.66,69.47) ; v1(77.22,53.47) 76.15,54.54 U3.43
LCD_G4: length 25.3
  TOP w0.127: v1(72.39,69.6) 72.39,57.66 72.52,57.53 74.93,57.53 75.06,57.4 75.06,53.72 v1(74.17,52.83)
  BOTTOM w0.127: U3.41 75.15,53.81 v1(74.17,52.83) ; v1(72.39,69.6) CN1.12
LCD_G5: length 24.4
  TOP w0.127: v1(74.17,53.59) 74.39,53.59 74.68,53.88 74.68,56.9 74.55,57.02 71.25,57.02 71.12,57.15 v1(71.12,69.6)
  BOTTOM w0.127: U3.40 74.65,54.07 v1(74.17,53.59) ; CN1.14 v1(71.12,69.6)
LCD_G6: length 24.8
  TOP w0.127: v1(73.15,53.47) 73.65,53.97 73.65,56.52 73.53,56.64 69.98,56.64 69.85,56.77 v1(69.85,69.6)
  BOTTOM w0.127: U3.38 73.65,53.96 v1(73.15,53.47) ; CN1.16 v1(69.85,69.6)
LCD_G7: length 25
  TOP w0.127: v1(73.15,54.49) 73.15,56.01 73.02,56.13 68.71,56.13 68.58,56.26 68.58,62.62 68.45,62.75 68.07,62.75 67.94,62.88 67.94,63.13 68.07,63.26 68.45,63.26 68.58,63.38 68.58,63.64 68.45,63.76 68.07,63.76 67.94,63.89 67.94,64.15 68.07,64.27 68.45,64.27 68.58,64.4 v1(68.58,69.6)
  BOTTOM w0.127: U3.37 v1(73.15,54.49) ; CN1.18 v1(68.58,69.6)
LCD_HSYNC: length 26
  TOP w0.127: v1(63.5,65.41) 63.5,64.77 63.37,64.64 62.87,64.64 62.74,64.51 62.74,64.26 62.87,64.13 63.37,64.13 63.5,64.01 63.5,63.75 63.37,63.63 62.87,63.63 62.74,63.5 62.74,63.24 62.87,63.12 63.37,63.12 63.5,62.99 63.5,62.74 63.37,62.61 62.87,62.61 62.74,62.48 62.74,62.23 62.87,62.1 63.37,62.1 63.5,61.97 63.5,59.05 67.69,54.86 67.69,53.78 68.36,53.11 71.21,53.11 v1(71.72,53.63)
  BOTTOM w0.127: U3.35 72.15,54.05 v1(71.72,53.63) ; CN1.26 v1(63.5,65.41)
LCD_INT: length 40.5
  TOP w0.127: v1(54.61,65.41) 54.61,63.37 67.18,50.8 68.45,50.8 77.5,41.75 U1.38
  BOTTOM w0.127: v1(54.61,65.41) CN1.39
LCD_R0: length 25.3
  BOTTOM w0.127: U2.47 62.15,54.1 62.27,53.98 63.63,53.98 63.75,54.1 63.75,55.12 63.88,55.24 66.55,55.24 66.67,55.37 66.67,56.9 66.8,57.02 75.69,57.02 77.47,58.8 CN1.3
LCD_R1: length 25
  BOTTOM w0.127: U2.46 61.65,56.66 61.93,56.94 62.95,56.94 63.12,56.77 63.12,55.75 63.25,55.63 66.17,55.63 66.29,55.75 66.29,57.05 66.64,57.4 75.53,57.4 76.2,58.07 76.2,60.68 76.33,60.81 76.96,60.81 77.09,60.93 77.09,61.19 76.96,61.31 76.33,61.31 76.2,61.44 CN1.5
LCD_R2: length 24.8
  BOTTOM w0.127: U2.44 60.65,56.71 60.87,56.94 61.39,56.94 61.77,57.32 63.37,57.32 63.5,57.19 63.5,56.13 63.63,56.01 65.79,56.01 65.91,56.13 65.91,57.21 66.49,57.78 75.38,57.78 75.82,58.23 75.82,60.2 75.69,60.32 75.56,60.32 75.44,60.45 75.44,60.71 75.56,60.83 75.69,60.83 75.82,60.96 75.82,61.47 74.93,62.36 CN1.7
LCD_R3: length 24.9
  BOTTOM w0.127: CN1.9 73.66,61.85 73.79,61.72 74.93,61.72 75.06,61.59 75.06,58.29 74.93,58.17 66.33,58.17 65.53,57.37 65.53,56.52 65.41,56.39 64.01,56.39 63.88,56.52 63.88,57.57 63.75,57.7 61.61,57.7 61.23,57.32 60.62,57.32 60.15,56.84 U2.43
LCD_R4: length 25.3
  BOTTOM w0.127: U2.41 59.15,56.73 60.11,57.7 61.07,57.7 61.45,58.08 64.14,58.08 64.26,57.95 64.26,56.9 64.39,56.77 65.02,56.77 65.15,56.9 65.15,57.53 66.17,58.55 74.3,58.55 74.42,58.67 74.42,61.21 74.3,61.34 72.77,61.34 72.64,61.47 72.64,61.98 72.39,62.23 CN1.11
LCD_R5: length 24.5
  BOTTOM w0.127: U2.40 58.65,56.77 59.95,58.08 60.91,58.08 61.3,58.46 64.52,58.46 64.64,58.33 64.64,58.04 64.77,57.91 65,57.91 65.15,58.07 65.15,58.29 65.28,58.42 65.5,58.42 66.01,58.93 73.91,58.93 74.04,59.05 74.04,60.83 73.91,60.96 72.39,60.96 72.26,61.09 72.26,61.59 72.14,61.72 71.75,61.72 71.12,62.36 CN1.13
LCD_R6: length 24.7
  BOTTOM w0.127: U2.38 57.65,56.66 58.01,57.02 58.36,57.02 59.8,58.46 60.75,58.46 61.13,58.84 65.39,58.84 65.85,59.31 73.53,59.31 73.66,59.44 73.66,60.45 73.53,60.58 72.01,60.58 71.88,60.71 71.88,61.21 71.75,61.34 71.6,61.34 71.22,61.72 70.9,61.72 70.48,61.72 69.85,62.36 CN1.15
LCD_R7: length 25.2
  BOTTOM w0.127: U2.37 57.15,56.69 57.86,57.4 58.2,57.4 59.64,58.84 60.59,58.84 60.97,59.22 65.23,59.22 65.7,59.69 73.03,59.69 73.15,59.82 73.15,60.07 73.03,60.2 72.17,60.2 71.63,60.2 71.5,60.32 71.5,60.9 71.06,61.34 70.33,61.34 69.95,61.72 69.09,61.72 68.58,62.23 CN1.17
LCD_RST: length 25.2
  TOP w0.127: v1(68.83,51.85) 67.96,51.85 65.28,54.53 65.28,54.99 57.15,63.12 v1(57.15,65.41)
  BOTTOM w0.127: U3.30 69.65,53.8 68.83,52.98 v1(68.83,51.85) ; CN1.36 v1(57.15,65.41)
LCD_VSYNC: length 25.7
  TOP w0.127: v1(62.23,65.41) 62.23,64.71 62.1,64.59 60.83,64.59 60.71,64.46 60.71,64.21 60.83,64.08 62.1,64.08 62.23,63.95 62.23,59.31 66.29,55.24 66.29,54.64 68.2,52.73 69.98,52.73 v1(70.18,52.53)
  BOTTOM w0.127: CN1.28 v1(62.23,65.41) ; v1(70.18,52.53) 71.15,53.49 U3.33
NETL3_2: length 7.7
  BOTTOM w0.406: 26.21,46.79 U4.8 26.68,46.11
  BOTTOM w0.508: 23.24,45.87 L3.2 ; L3.2 21.77,46.66 ; L3.2 23.24,47.45 ; L3.2 24.71,46.66 ; Z1.1 22.23,41.38 ; Z1.1 21.45,40.77 ; Z1.1 22.23,40.16
NETR2_2: length 2.3
  BOTTOM w0.254: U4.2 27.33,51.84 R2.2
NETR5_1: length 3.9
  BOTTOM w0.381: R6.1 R5.1 26.67,44.74 26.67,44.96 27.33,45.62 U4.7
R0: length 35.7
  TOP w0.127: v1(51.94,33.02) 51.22,33.74 51.22,35.13 51.1,35.25 U1.5
  BOTTOM w0.127: v1(51.94,33.02) 51.94,31.75 52.07,31.62 57.78,31.62 57.91,31.75 57.91,36.07 58.04,36.2 62.02,36.2 62.15,36.32 62.15,36.74 62.02,36.87 60.58,36.87 60.45,37 60.45,37.25 60.58,37.38 62.02,37.38 62.15,37.5 U2.2
R1: length 35.8
  TOP w0.127: v1(51.9,33.82) U1.6
  BOTTOM w0.127: v1(51.9,33.82) 52.32,33.82 52.45,33.7 52.45,32.13 52.58,32 57.4,32 57.53,32.13 57.53,36.63 57.66,36.76 59.94,36.76 60.07,36.89 60.07,37.14 59.94,37.27 57.66,37.27 57.53,37.4 57.53,37.72 57.66,37.85 61.52,37.85 61.65,37.97 U2.3
R2: length 37
  TOP w0.127: U1.7 v1(52.7,34.67)
  BOTTOM w0.127: v1(52.7,34.67) 52.7,34.67 52.83,34.54 52.83,32.51 52.96,32.38 57.02,32.38 57.15,32.51 57.15,38.1 57.28,38.23 61.09,38.23 61.21,38.35 61.21,38.61 61.09,38.73 57.4,38.73 57.28,38.86 57.28,39.12 57.4,39.24 61.09,39.24 61.21,39.37 61.21,46.35 61.09,46.48 60.77,46.48 60.65,46.61 U2.5
R3: length 36.4
  TOP w0.127: U1.8 53.5,35.18 53.34,35.02 53.34,34.29 v1(53.85,33.78)
  BOTTOM w0.127: U2.6 60.15,46.23 60.27,46.1 60.71,46.1 60.83,45.97 60.83,40.89 60.71,40.77 56.9,40.77 56.77,40.64 56.77,40.36 56.9,40.23 60.71,40.23 60.83,40.11 60.83,39.88 60.71,39.75 56.9,39.75 56.77,39.62 56.77,32.89 56.64,32.77 53.47,32.77 53.34,32.89 53.34,33.66 53.47,33.78 v1(53.85,33.78)
R4: length 36
  TOP w0.127: v1(53.85,34.67) 54.3,35.12 U1.9
  BOTTOM w0.127: U2.8 59.15,45.83 59.27,45.7 60.33,45.7 60.45,45.57 60.45,45.32 60.33,45.19 59.27,45.19 59.15,45.07 59.15,44.81 59.27,44.68 60.33,44.68 60.45,44.56 60.45,44.3 60.33,44.18 59.27,44.18 59.15,44.05 59.15,43.8 59.27,43.67 60.33,43.67 60.45,43.54 60.45,43.29 60.33,43.16 59.27,43.16 59.15,43.03 59.15,42.78 59.27,42.65 60.33,42.65 60.45,42.53 60.45,42.27 60.33,42.14 59.27,42.14 59.15,42.02 59.15,41.76 59.27,41.64 60.33,41.64 60.45,41.51 60.45,41.27 60.33,41.15 56.52,41.15 56.39,41.02 56.39,33.27 56.26,33.15 54.48,33.15 54.36,33.27 54.36,34.16 v1(53.85,34.67)
R5: length 36.6
  TOP w0.127: v1(55.28,35.53) 55.1,35.71 U1.10
  BOTTOM w0.127: v1(55.28,35.53) 55.24,35.53 55.12,35.66 55.12,36.05 55.24,36.18 55.88,36.18 56.01,36.31 56.01,36.56 55.88,36.69 55.12,36.69 54.99,36.81 54.99,37.07 55.12,37.19 55.88,37.19 56.01,37.32 56.01,37.58 55.88,37.7 55.12,37.7 54.99,37.83 54.99,38.08 55.12,38.21 55.88,38.21 56.01,38.34 56.01,38.59 55.88,38.72 55.12,38.72 54.99,38.85 54.99,39.1 55.12,39.23 55.88,39.23 56.01,39.35 56.01,39.61 55.88,39.73 55.12,39.73 54.99,39.86 54.99,40.12 55.12,40.24 55.88,40.24 56.01,40.37 56.01,40.62 55.88,40.75 55.12,40.75 54.99,40.88 54.99,41.4 55.12,41.53 58.52,41.53 58.65,41.66 58.65,41.91 58.52,42.04 55.12,42.04 54.99,42.16 54.99,42.42 55.12,42.55 58.52,42.55 58.65,42.67 58.65,42.93 58.52,43.05 58.17,43.05 58.04,43.18 58.04,43.43 58.17,43.56 58.52,43.56 58.65,43.69 58.65,43.94 58.52,44.07 58.17,44.07 58.04,44.2 58.04,44.45 58.17,44.58 58.52,44.58 58.65,44.7 58.65,44.96 58.52,45.09 58.17,45.09 58.04,45.21 58.04,45.47 58.17,45.59 58.52,45.59 58.65,45.72 58.65,48.41 U2.9
R6: length 35.8
  TOP w0.127: v1(55.26,34.76) 55.9,35.4 U1.11
  BOTTOM w0.127: v1(55.26,34.76) 54.61,35.41 54.61,39.28 54.48,39.4 52.58,39.4 52.45,39.53 52.45,39.78 52.58,39.91 54.48,39.91 54.61,40.04 54.61,40.29 54.48,40.42 52.58,40.42 52.45,40.55 52.45,40.8 52.58,40.93 54.48,40.93 54.61,41.05 54.61,41.31 54.48,41.44 52.58,41.44 52.45,41.56 52.45,41.82 52.58,41.94 54.48,41.94 54.61,42.07 54.61,42.32 54.48,42.45 52.58,42.45 52.45,42.58 52.45,42.8 52.58,42.93 57.52,42.93 57.65,43.05 U2.11
R7: length 36.1
  TOP w0.127: v1(55.24,34.02) 55.36,34.02 56.7,35.36 U1.12
  BOTTOM w0.127: v1(55.24,34.02) 54.1,35.16 54.1,35.81 53.98,35.94 52.32,35.94 52.2,36.07 52.2,36.32 52.32,36.45 53.98,36.45 54.1,36.58 54.1,36.83 53.98,36.96 52.32,36.96 52.2,37.08 52.2,37.34 52.32,37.47 53.98,37.47 54.1,37.59 54.1,37.85 53.98,37.97 52.32,37.97 52.2,38.1 52.2,38.35 52.32,38.48 53.98,38.48 54.1,38.61 54.1,38.86 53.98,38.99 52.2,38.99 52.07,39.12 52.07,43.18 52.2,43.31 57.02,43.31 57.15,43.43 U2.12
RST: length 36
  TOP w0.127: v1(71.63,40.64) 71.63,41.53 71.75,41.66 76.57,41.66 76.7,41.53 U1.37
  BOTTOM w0.127: U3.19 69.65,47.46 69.14,46.95 68.45,46.95 68.33,46.82 68.33,43.69 68.2,43.56 63.88,43.56 63.75,43.43 63.75,38.23 63.88,38.1 64.77,38.1 64.9,38.23 64.9,39.24 65.02,39.37 70.99,39.37 71.12,39.5 71.12,40.51 71.25,40.64 v1(71.63,40.64)
VL: length 14
  BOTTOM w0.508: 23.11,56.25 L2.2 22.5,56.9 ; 22.43,53.59 C4.2 ; C4.2 23.08,52.98 ; C4.2 23.08,54.2 ; C5.1 23.32,51.69 ; C5.1 22.53,50.72 ; C5.1 22.53,52.65 ; C5.1 21.74,51.69 ; L3.1 23.24,50.39 ; L3.1 24.71,49.61 ; L3.1 21.77,49.61 ; L3.1 23.24,48.82 ; 26.68,50.33 U4.1 26.27,49.73 ; 23.08,54.51 C3.2 ; C3.2 22.43,55.12 ; C3.2 23.08,55.73
VSYNC: length 36.2
  TOP w0.127: v1(72.9,40.13) 75.31,40.13 75.44,40.01 75.44,39.5 75.31,39.37 73.63,39.37 73.5,39.24 U1.33
  BOTTOM w0.127: U3.16 71.15,47.41 71.31,47.24 71.31,42.93 71.18,42.8 64.64,42.8 64.52,42.67 64.52,41.66 64.64,41.53 65.91,41.53 66.04,41.4 66.04,41.02 65.91,40.89 64.64,40.89 64.52,40.77 64.52,40.51 64.64,40.39 70.23,40.39 70.36,40.51 70.36,41.4 70.48,41.53 73.35,41.53 73.48,41.4 73.48,40.26 73.35,40.13 v1(72.9,40.13)

## Copper pours and planes (outline as drawn; the poured copper is in the pictures)
+3V3 on BOTTOM (solid shape): 46.61,67.44 45.24,67.44 45.75,67.95 45.25,68.45 46.61,68.45
+3V3 on TOP: 42.67,51.05 47.75,51.05 48.01,50.8 48.01,49.28 47.88,49.15 42.67,49.15 42.42,49.4 42.42,50.8
+3V3 on BOTTOM: 48.51,66.29 47.88,65.66 47.88,65.28 47.75,65.15 46.74,65.15 46.48,65.41 45.72,65.41 45.59,65.53 45.59,66.93 45.72,67.06 45.72,69.22 46.1,69.6 48.26,69.6 48.51,69.34
+3V3 on L3_VCC: 43.92,24.26 37.85,30.33 37.85,62.89 39.73,64.77 44.94,64.77 45.47,65.3 45.47,69.11 45.83,69.47 49.66,69.47 50.04,69.09 50.04,59.82 48.77,58.55 48.77,43.96 49.42,43.31 51.79,43.31 52.32,43.84 52.32,46.97 51.56,47.73 51.56,50.69 52.05,51.18 61.98,51.18 62.23,50.93 62.23,45.59 62.61,45.21 67.44,45.21 67.94,45.72 67.94,48.77 67.44,49.28 67.44,50.8 67.82,51.18 77.11,51.18 78.36,49.93 78.36,26.39 76.22,24.26
GND on TOP: 0.51,0.51 0.51,72.49 126.49,72.49 126.49,0.51 ; 2 cut-outs
GND on BOTTOM: 0.51,0.51 0.51,72.49 126.49,72.49 126.49,0.51 ; 6 cut-outs
GND on L2_GND: 0.51,0.51 0.51,72.49 126.49,72.49 126.49,0.51
VDD on BOTTOM (solid shape): 45.5,67.94 44.99,67.44 44.07,67.44 44.07,68.45 44.99,68.45
VDD on BOTTOM: 44.83,65.28 42.93,65.28 42.67,65.53 42.67,70.74 43.43,71.5 49.28,71.5 49.91,70.87 49.91,69.09 49.15,69.09 49.02,69.22 49.02,69.85 48.77,70.1 45.72,70.1 44.7,69.09 44.7,66.93 44.96,66.67 44.96,65.41
VDD on L3_VCC: 0.51,0.51 0.51,72.49 126.49,72.49 126.49,0.51 ; 3 cut-outs
BLGND on BOTTOM: 24.13,57.4 30.61,57.4 35.05,61.85 46.74,61.85 47.62,62.74 47.62,64.39 47.88,64.64 50.04,64.64 50.04,61.59 47.62,59.18 37.59,59.18 34.54,56.13 34.54,38.86 34.04,38.35 30.1,38.35 29.34,39.12 29.34,47.37 29.21,47.5 25.91,47.5 25.65,47.75 25.65,48.77 25.91,49.02 29.84,49.02 31.24,50.42 31.24,52.45 30.73,52.96 26.92,52.96 26.67,52.7 26.67,51.18 26.42,50.93 24.77,50.93 24.13,51.56
LCD_BL_A on BOTTOM: 23.75,38.61 28.19,38.61 28.57,38.99 28.57,45.21 28.19,45.59 27.81,45.59 27.43,45.21 27.43,42.8 26.92,42.29 23.62,42.29 23.37,42.04 23.37,38.99
NETL3_2 on BOTTOM: 26.8,47.24 25.4,47.24 25.02,47.62 21.08,47.62 20.07,46.61 20.07,39.5 20.57,38.99 22.73,38.99 22.86,39.12 22.86,44.7 23.75,45.59 26.67,45.59 26.92,45.85 26.92,47.12
VL on BOTTOM: 20.57,57.4 23.62,57.4 23.75,57.28 23.75,50.8 23.88,50.67 26.8,50.67 26.92,50.55 26.92,49.53 26.8,49.4 25.53,49.4 24.77,48.64 20.7,48.64 20.32,49.02 20.32,57.15

## Text on the board
Ref Des/Silkscreen Bottom: B | A
Ref Des/Silkscreen Top: S | A | MB1315A
User.8: FIGURE | SIZE | 12.0 | 177.0 | 38.0 | TOLERANCE | +3.0/-3.0 | +2.0/-2.0 | DRILL CHART: TOP to BOTTOM | ALL UNITS ARE IN MILS | PLATED | NON-PLATED | ROTATION | - | QTY | 250 | 4 | 2 | 258 | TOTAL HOLES:
